# Altium PCB GoldenArduino.PcbDoc
Units mil, origin at the board's own origin, x right, y up, seen from the top; angles counter-clockwise.
Board outline 2625 x 3495 mil, 2 copper layers (Top Layer, Bottom Layer); 52 components, 50 nets, 229 pads, 99 vias.
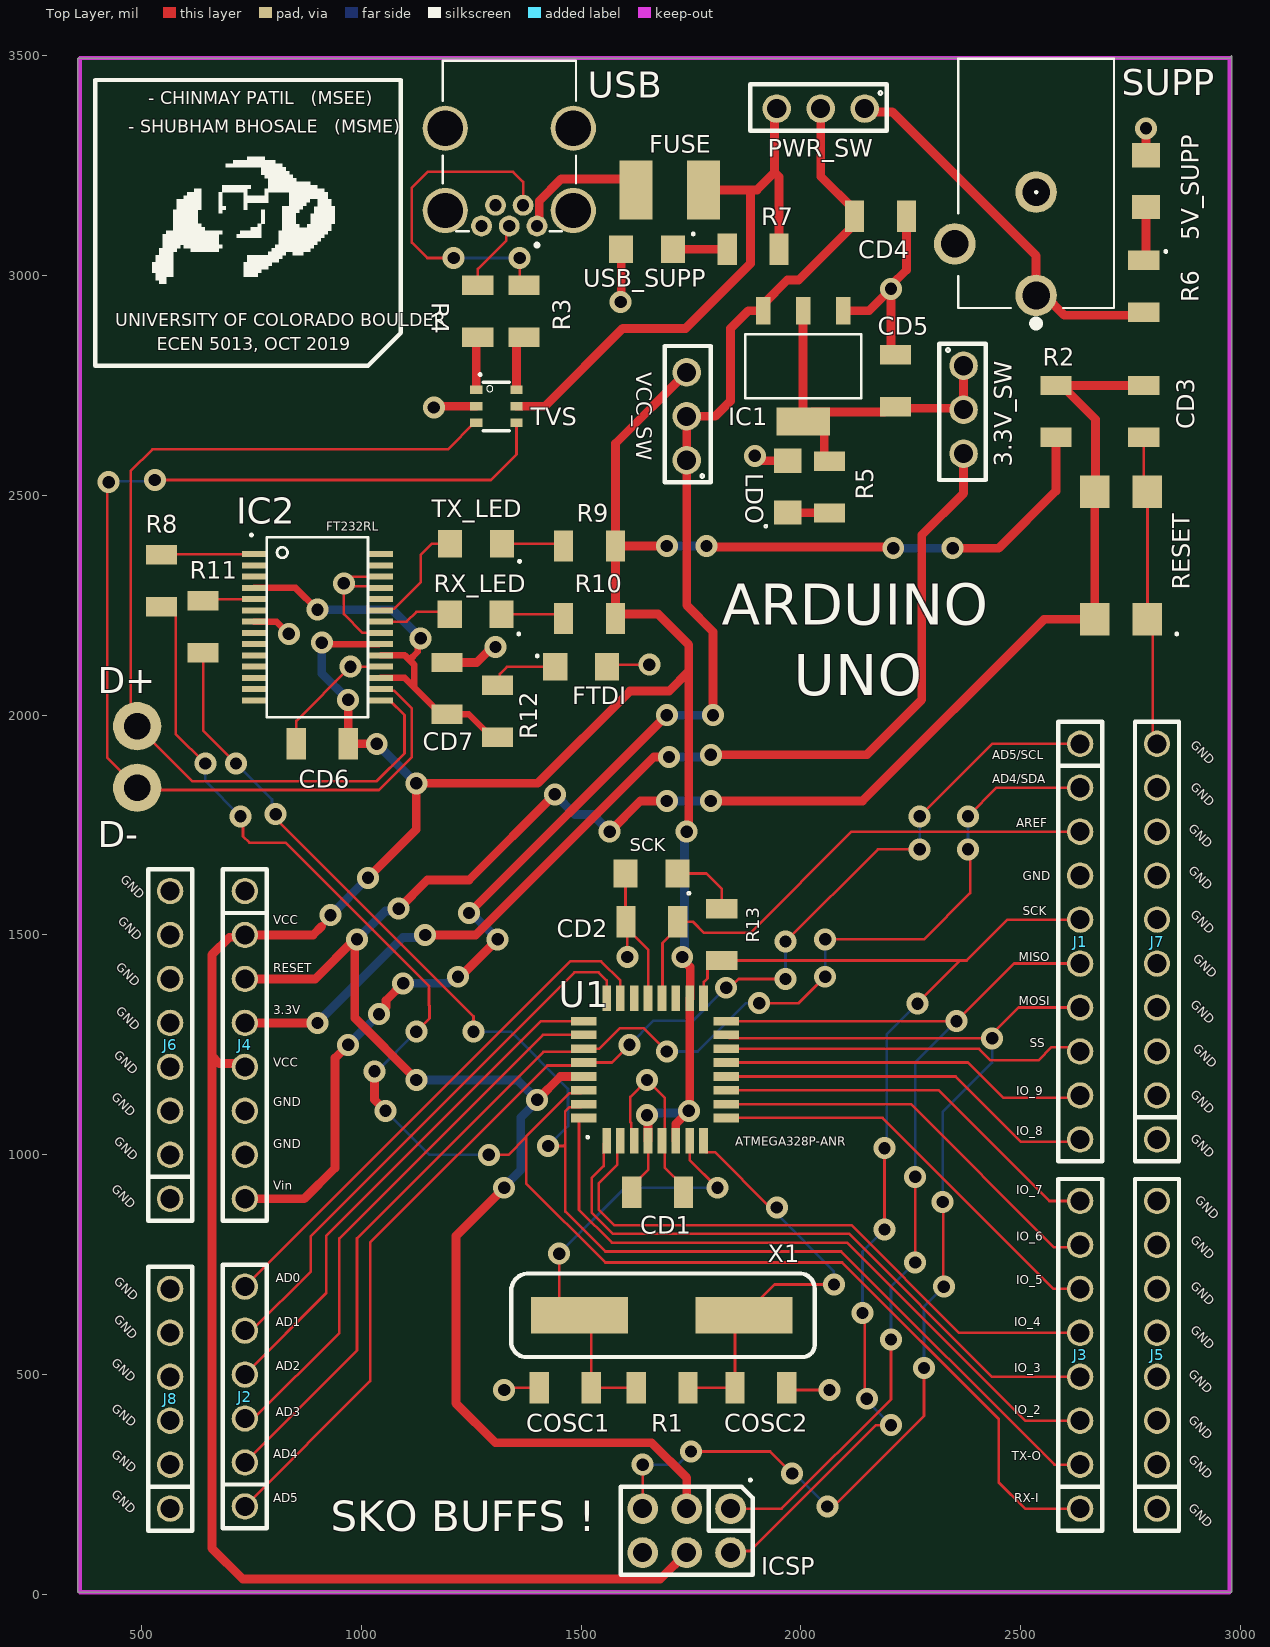
[diagram p0: Top Layer view]
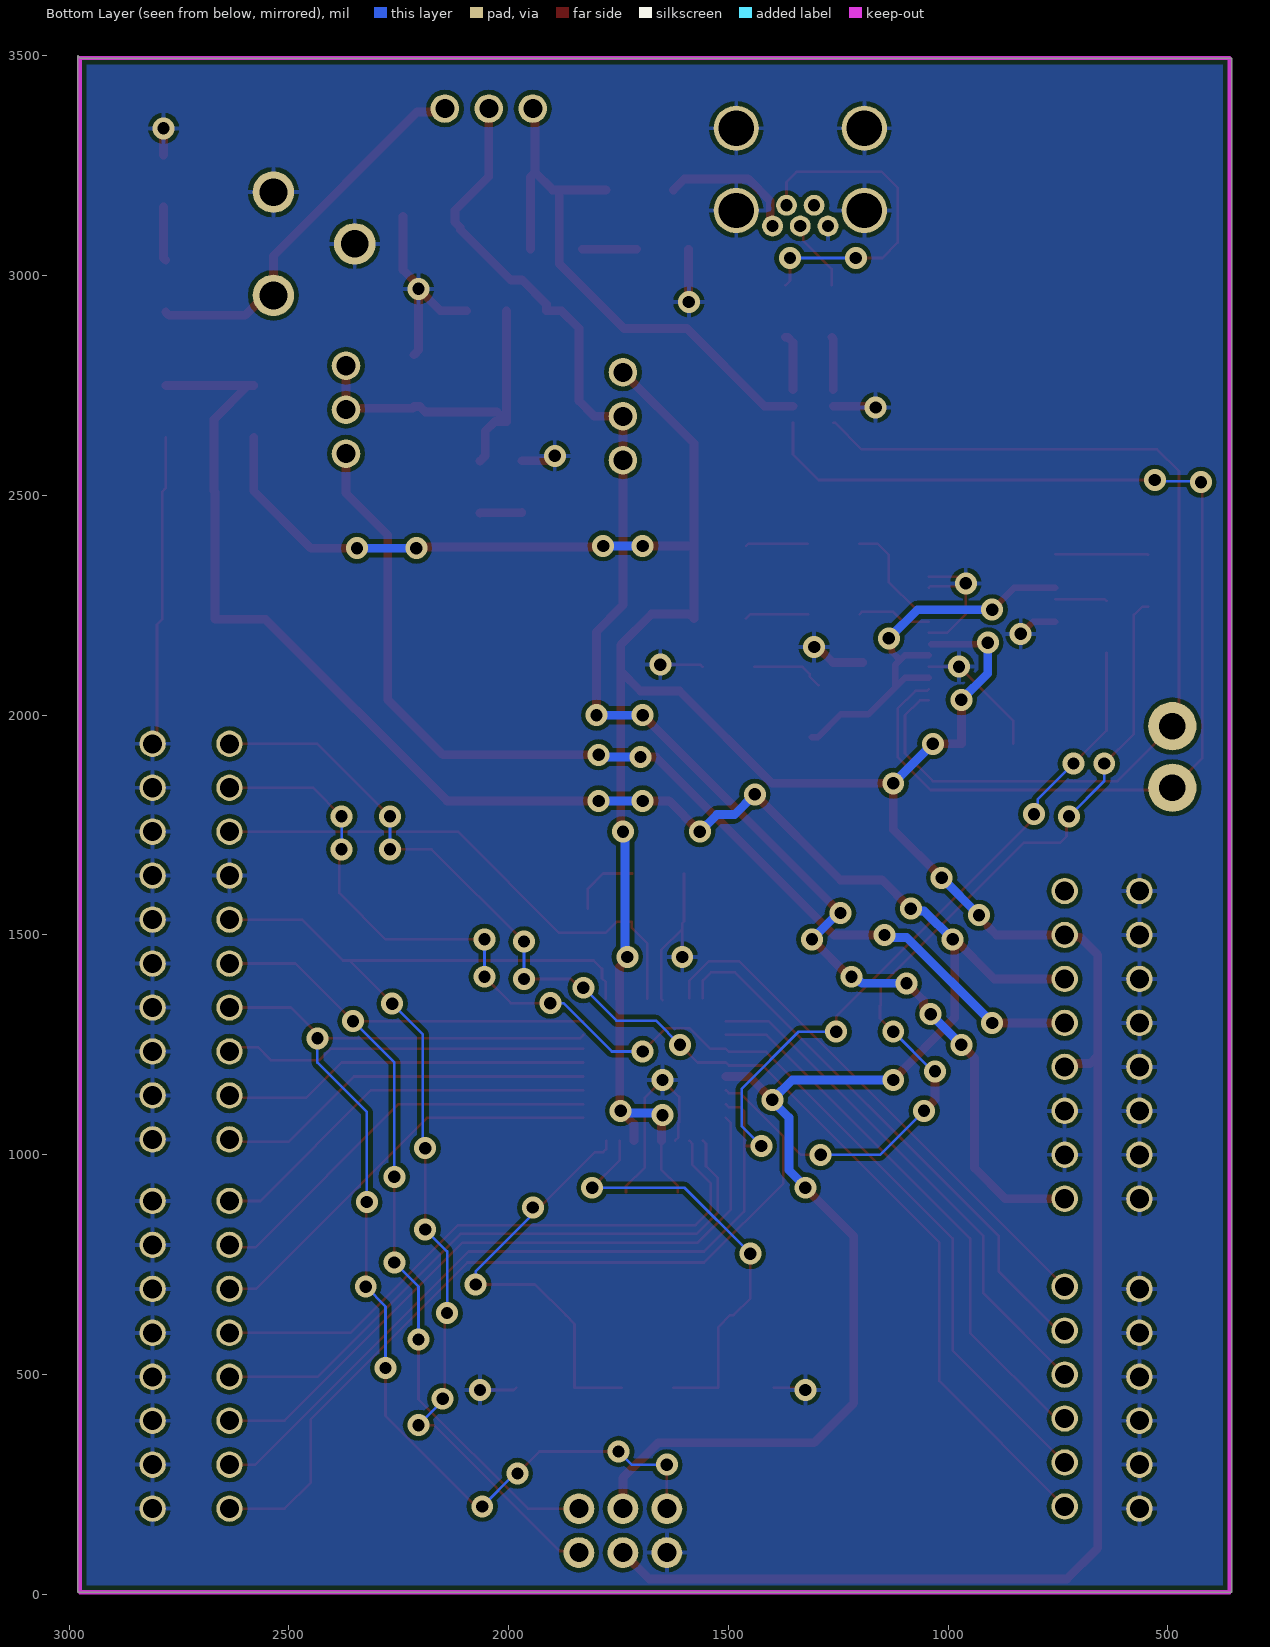
[diagram p1: Bottom Layer view, seen from below]

## Layer stack, top to bottom
Top Solder: solder mask 0.4, Solder Resist, Dk 3.5
Top Layer: signal copper 1.4
Dielectric 1: dielectric 12.6, FR-4, Dk 4.8
Bottom Layer: signal copper 1.4
Bottom Solder: solder mask 0.4, Solder Resist, Dk 3.5

## Board outline
355,3495 355,5 2980,5 2980,3500 2975,3495

## Design rules (kind name [scope] priority, off if disabled: settings)
Clearance [All] p1: gap=10 ignorepadtopadclearanceinfootprint=FALSE except(0: Arc-Hole Track-Hole SMDPad-Hole THPad-Hole Via-Hole Fill-Hole Poly-Hole Region-Hole Text-Hole)
PlaneConnect [All] p1: pad.planeconnectstyle=Relief pad.reliefexpansion=20 pad.reliefentries=4 pad.reliefconductorwidth=10 pad.reliefairgap=10 via.planeconnectstyle=Direct via.reliefexpansion=20 via.reliefentries=4 via.reliefconductorwidth=10 via.reliefairgap=10
PolygonConnect [All] p1: connectstyle=Relief reliefconductorwidth=10 reliefentries=4 polygonreliefangle="90 Angle" airgapwidth=10
RoutingVias [All] p1: holewidth=28 width=50 viastyle="Through Hole" minholewidth=28 minwidth=50 maxholewidth=28 maxwidth=50
SolderMaskExpansion [All] p1: expansion=4
Width [All] p1: maxlimit=20 minlimit=6 preferedwidth=6 minimp=50.000000 maximp=50.000000 favimp=50.000000
29 further rules are at their usual default settings.

## Classes and differential pairs
component class PowerSupply: 3.3V_SW 5V_SUPP 60 CD4 CD5 FUSE IC1 LDO PWR_SW R3 R4 R5 R6 R7 SUPP TVS USB USB_SUPP VCC_SW
component class FTDIChip: CD6 CD7 D+ D- FTDI IC2 R8 R9 R10 R11 R12 RX_LED TX_LED
component class Atmega328: CD1 CD2 CD3 COSC1 COSC2 ICSP J1 J2 J3 J4 J5 J6 J8 R1 R2 R13 RESET SCK U1 X1

## Components (designator, comment, footprint, x,y, rotation, side; value= is the part's Value field where it differs from the comment)
3.3V_SW "PREC003SAAN-RC" 3_PIN 2370.05,2795 r270 top value="CONN HEADER VERT 3POS 2.54MM" (schematic designator H3)
5V_SUPP "LTST-C150CKT" LED 2785,3215 r0 top value="LED RED CLEAR 1206 SMD" (schematic designator D3)
CD1 "22uF" 1206_Passive 1614,915 r0 top value="CAP CER 22UF 16V X5R 1206"
CD2 "22uF" 1206_Passive 1601,1530 r0 top value="CAP CER 22UF 16V X5R 1206"
CD3 "22uF" 1206_Passive 2780,2751 r270 top value="CAP CER 22UF 16V X5R 1206"
CD4 "22uF" 1206_Passive 2121,3135 r0 top value="CAP CER 22UF 16V X5R 1206"
CD5 "22uF" 1206_Passive 2215,2701 r90 top value="CAP CER 22UF 16V X5R 1206"
CD6 "22uF" 1206_Passive 971,1935 r180 top value="CAP CER 22UF 16V X5R 1206"
CD7 "22uF" 1206_Passive 1195,2001 r90 top value="CAP CER 22UF 16V X5R 1206"
COSC1 "22pF" 1206_Passive 1404,470 r0 top value="CAP CER 22PF 16V C0G/NP0 1206"
COSC2 "22pF" 1206_Passive 1969,470 r180 top value="CAP CER 22PF 16V C0G/NP0 1206"
D+ "TESTPOINT" "TEST POINT" 490,1975 r0 top (schematic designator T2)
D- "TESTPOINT" "TEST POINT" 490,1835 r0 top (schematic designator T1)
FTDI "LTST-C150CKT" LED 1500,2110 r270 top value="LED RED CLEAR 1206 SMD" (schematic designator D7)
FUSE "MF-MSMF050-2" FUSE 1776.77,3205 r180 top value="PTC RESET FUSE 15V 500MA 1812" (schematic designator F1)
IC1 "AZ1117CH-3.3TRG1" LDO 2005,2795 r0 top value="IC REG LINEAR 3.3V 800MA SOT223"
IC2 "FT232RL-REEL" FTDI 910,2190 r0 top value="IC USB FS SERIAL UART 28-SSOP"
ICSP "ICSP" ICSP 1840,195 r270 top value=NRPN032PAEN-RC (schematic designator J9)
J1 "PPTC101LFBN-RC" 10_PIN 2635,1032.24 r90 top value="CONN HDR 10POS 0.1 TIN PCB"
J2 "PPTC061LFBN-RC" 6_PIN 735,202.37 r90 top value="CONN HDR 6POS 0.1 TIN PCB"
J3 "PPTC081LFBN-RC" 8_PIN 2635,895 r270 top value="CONN HDR 8POS 0.1 TIN PCB"
J4 "PPTC081LFBN-RC" 8_PIN 735,900 r90 top value="CONN HDR 8POS 0.1 TIN PCB"
J5 "PPTC081LFBN-RC" 8_PIN 2810,895 r270 top value="CONN HDR 8POS 0.1 TIN PCB"
J6 "PPTC081LFBN-RC" 8_PIN 565,1600 r270 top value="CONN HDR 8POS 0.1 TIN PCB"
J7 "PPTC101LFBN-RC" 10_PIN 2810,1937.76 r270 top value="CONN HDR 10POS 0.1 TIN PCB"
J8 "PPTC061LFBN-RC" 6_PIN 565,197.37 r90 top value="CONN HDR 6POS 0.1 TIN PCB"
LDO "LTST-C150CKT" LED 1970,2520 r0 top value="LED RED CLEAR 1206 SMD" (schematic designator D2)
PWR_SW "PREC003SAAN-RC" 3_PIN 2145,3379.95 r180 top value="CONN HEADER VERT 3POS 2.54MM" (schematic designator H1)
R1 "1M" 1206_Passive 1744,470 r180 top value="RES 1M OHM 5% 1/4W 1206"
R2 "RNCP1206FTD1K00" 1206_Passive 2580,2631 r90 top value="RES 1K OHM 1% 1/2W 1206"
R3 "RMCF1206JT300R‎" 1206_Passive 1370,2979 r270 top value=300Ohm
R4 "RMCF1206JT300R‎" 1206_Passive 1265,2859 r90 top value=300Ohm
R5 "RNCP1206FTD1K00" 1206_Passive 2065,2459 r90 top value="RES 1K OHM 1% 1/2W 1206"
R6 "RNCP1206FTD1K00" 1206_Passive 2780,2916 r90 top value="RES 1K OHM 1% 1/2W 1206"
R7 "RNCP1206FTD1K00" 1206_Passive 1951,3060 r180 top value="RES 1K OHM 1% 1/2W 1206"
R8 "RNCP1206FTD1K00" 1206_Passive 545,2366 r270 top value="RES 1K OHM 1% 1/2W 1206"
R9 "RNCP1206FTD1K00" 1206_Passive 1579,2385 r180 top value="RES 1K OHM 1% 1/2W 1206"
R10 "RNCP1206FTD1K00" 1206_Passive 1579,2220 r180 top value="RES 1K OHM 1% 1/2W 1206"
R11 "RNCP1206FTD1K00" 1206_Passive 640,2261 r270 top value="RES 1K OHM 1% 1/2W 1206"
R12 "RNCP1206FTD1K00" 1206_Passive 1310,1949 r90 top value="RES 1K OHM 1% 1/2W 1206"
R13 "RNCP1206FTD1K00" 1206_Passive 1820,1561 r270 top value="RES 1K OHM 1% 1/2W 1206"
RESET "RESET SWITCH" Switch 2730,2365 r0 top value="SWITCH TACTILE SPST-NO 50MA 12V" (schematic designator SW1)
RX_LED "LTST-C150CKT" LED 1260,2230 r90 top value="LED RED CLEAR 1206 SMD" (schematic designator D6)
SCK "LTST-C150CKT" LED 1660,1640 r90 top value="LED RED CLEAR 1206 SMD" (schematic designator D8)
SUPP "Power Jack" Power_Jack 2535,2955 r90 top value="CONN PWR JACK 2X5.5MM SOLDER" (schematic designator J11)
TVS "IP4234CZ6,125" TVS 1305,2700 r90 top value="TVS DIODE 5.5V 6TSOP" (schematic designator D1)
TX_LED "LTST-C150CKT" LED 1261,2390 r90 top value="LED RED CLEAR 1206 SMD" (schematic designator D5)
U1 "ATMEGA328P-ANR" ATMega328P 1668,1195.93 r270 top value="IC MCU 8BIT 32KB FLASH 32TQFP"
USB "XM7D-0512" USB 1482.17,3340.2 r270 top value="CONN RCPT USB2.0 MINI B 5P R/A" (schematic designator J10)
USB_SUPP "LTST-C150CKT" LED 1650,3060 r90 top value="LED RED CLEAR 1206 SMD" (schematic designator D4)
VCC_SW "PREC003SAAN-RC" 3_PIN 1739.95,2580 r90 top value="CONN HEADER VERT 3POS 2.54MM" (schematic designator H2)
X1 "ABLS-16.000MHZ-B4-T" Crystal 1495.98,635 r0 top value="CRYSTAL 16.0000MHZ 18PF SMD"

## Footprints (in the part's own frame and the unit in brackets; to place one, negate y for a bottom-side part, rotate by r counter-clockwise, add the part's x,y. Pads: shape width x height; smd on the part's side, far side on the other; paste and mask are expansions set on the pad)
3_PIN [mm]
  round 1.65 hole 1.1: 1(0,-0.001) 2(2.54,-0.001) 3(5.08,-0.001)
  silkscreen extent -1.27,-1.4 6.6,1.27
6_PIN [mil]
  round 60 hole 43.31: 1(-2.37,0) 2(97.63,0) 3(197.63,0) 4(297.63,0) 5(397.63,0) 6(497.63,0)
  silkscreen extent -52,-50 548,50
8_PIN [mil]
  round 60 hole 43.31: 1(700,0) 2(600,0) 3(500,0) 4(400,0) 5(300,0) 6(200,0) 7(100,0) 8(0,0)
  silkscreen extent -50,-50 750,50
10_PIN [mil]
  round 60 hole 43.31: 1(902.76,0) 2(802.76,0) 3(702.76,0) 4(602.76,0) 5(502.76,0) 6(402.76,0) 7(302.76,0) 8(202.76,0) 9(102.76,0) 10(2.76,0)
  silkscreen extent -47,-50 953,50
1206_Passive [mil]
  rect 44x71 smd: 1(1,0) 2(119,0)
ATMega328P [mil]
  rect 58x20 smd: 1(163.93,-110) 2(163.93,-79) 3(163.93,-47) 4(163.93,-16) 5(163.93,16) 6(163.93,47) 7(163.93,79) 8(163.93,110) 17(-160.07,110) 18(-160.07,79) 19(-160.07,47) 20(-160.07,16) 21(-160.07,-16) 22(-160.07,-47) 23(-160.07,-79) 24(-160.07,-110)
  rect 20x58 smd: 9(111.93,162) 10(80.93,162) 11(48.93,162) 12(17.93,162) 13(-14.07,162) 14(-45.07,162) 15(-77.07,162) 16(-108.07,162) 25(-108.07,-162) 26(-77.07,-162) 27(-45.07,-162) 28(-14.07,-162) 29(17.93,-162) 30(48.93,-162) 31(80.93,-162) 32(111.93,-162)
Crystal [mm]
  rect 5.6x2.1 smd: 1(0,0) 2(9.5,0)
  silkscreen extent -3.95,-2.41 13.6,2.41
FTDI [mil]
  rect 55x13.7 smd: 1(-153.94,176.34) 2(-153.94,150.75) 3(-153.94,125.16) 4(-153.94,99.57) 5(-153.94,73.98) 6(-153.94,48.39) 7(-153.94,22.8) 8(-153.94,-2.8) 9(-153.94,-28.39) 10(-153.94,-53.98) 11(-153.94,-79.57) 12(-153.94,-105.16) 13(-153.94,-130.75) 14(-153.94,-156.34) 15(133.94,-156.34) 16(133.94,-130.75) 17(133.94,-105.16) 18(133.94,-79.57) 19(133.94,-53.98) 20(133.94,-28.39) 21(133.94,-2.8) 22(133.94,22.8) 23(133.94,48.39) 24(133.94,73.98) 25(133.94,99.57) 26(133.94,125.16) 27(133.94,150.75) 28(133.94,176.34)
  silkscreen extent -125,-195 105,215
FUSE [mm]
  rect 1.9x3.4 smd: 1(3.855,0.254) 2(-0.045,0.254)
ICSP [mil]
  round 70 hole 43.31: 1(0,0) 2(100,0) 3(0,-100) 4(100,-100) 5(0,-200) 6(100,-200)
  silkscreen extent -50,-250 150,50
LDO [mil]
  rect 33x63 smd: 1(91,124.94) 2(0,124.94) 3(-91,124.94)
  rect 122x63 smd: 4(0,-127.06)
  silkscreen extent -132,-74 132,72
LED [mil]
  rect 63x55 smd: 1(0,59) 2(0,-59)
Power_Jack [mm]
  round 2.4 hole 1.6: 1(0,0) 2(5.969,0) 3(2.977,4.7)
  silkscreen extent -1.82,-4.5 13.68,4.5
Switch [mm]
  rect 1.7x1.9 smd: 1(1.479,-3.727) 2(1.479,3.639) 3(-1.569,-3.727) 4(-1.569,3.639)
"TEST POINT" [mil]
  round 110 hole 60: 1(0,0)
TVS [mm]
  rect 0.508x0.7 smd: 1(1.02,1.106) 2(0.07,1.106) 3(-0.88,1.106) 4(-0.88,-1.22) 5(0.07,-1.22) 6(1.02,-1.22)
  silkscreen extent -1.33,-0.81 1.47,0.69
USB [mm]
  round 1.208 hole 0.7: 1(5.777,-2.1) 2(4.577,-2.9) 3(5.777,-3.7) 4(4.577,-4.5) 5(5.777,-5.3)
  round 2.616 hole 2.032: SH1(0.127,-7.4) SH2(4.877,-7.4) SH3(4.877,0) SH4(0.127,0)
  silkscreen extent -3.77,-7.55 6.98,0.15

## Part data
3.3V_SW PWR_SW VCC_SW: library part 3_PIN, "Connector Header Through Hole 3 position 0.100\" (2.54mm)", Digikey Link=https://www.digikey.com/product-detail/en/PREC003SAAN-RC/S1012EC-03-ND/2774851/?itemSeq=304982371, Digikey Part=S1012EC-03-ND
5V_SUPP FTDI LDO RX_LED SCK TX_LED USB_SUPP: library part 1206_RED_LED, "Red 638nm LED Indication - Discrete 1.8V 1206 (3216 Metric)", Digikey Link=https://www.digikey.com/product-detail/en/LTST-C150CKT/160-1167-1-ND/269239/?itemSeq=304982368, Digikey Part=160-1167-1-ND
CD1 CD2 CD3 CD4 CD5 CD6 CD7: library part 1206_22uF, "22µF ±20% 16V Ceramic Capacitor X5R 1206 (3216 Metric)", Digikey Link=https://www.digikey.com/product-detail/en/CL31A226MOCLNNC/1276-2728-1-ND/3890814/?itemSeq=304982363, Digikey Part=1276-2728-1-ND
COSC1 COSC2: library part 1206_22pF, "22pF ±5% 16V Ceramic Capacitor C0G, NP0 1206 (3216 Metric)", Digikey Link=https://www.digikey.com/product-detail/en/885012008011/732-7867-1-ND/5454494/?itemSeq=304982362, Digikey Part=732-7867-1-ND
D+ D-: library part "TEST POINT"
FUSE: library part Fuse, "Polymeric PTC Resettable Fuse 15V 500mA Ih Surface Mount 1812 (4532 Metric), Concave", Digikey Link=https://www.digikey.com/product-detail/en/MF-MSMF050-2/MF-MSMF050-2CT-ND/662842/?itemSeq=304982360, Digikey Part=MF-MSMF050-2CT-ND
IC1: library part 3.3V_LDO, "Linear Voltage Regulator IC Positive Fixed 1 Output 1A SOT-223", Digikey Link=https://www.digikey.com/product-detail/en/AZ1117CH-3.3TRG1/AZ1117CH-3.3TRG1DICT-ND/4505206/?itemSeq=304982370, Digikey Part=AZ1117CH-3.3TRG1DICT-ND
IC2: library part FTDI, "USB Bridge, USB to UART USB 2.0 UART Interface 28-SSOP", Digikey Link=https://www.digikey.com/product-detail/en/FT232RL-REEL/768-1007-1-ND/1836402/?itemSeq=304982359, Digikey Part=768-1007-1-ND
ICSP: "Connector Header Through Hole 6 position 0.079\" (2.00mm)", Digikey Link=https://www.digikey.com/product-detail/en/NRPN032PAEN-RC/S5801-03-ND/804955/?itemSeq=304982355, Digikey Part=S5801-03-ND
J1 J7: library part 10_PIN_FEMALE, "10 Position Header Connector 0.100\" (2.54mm) Through Hole Tin", Digikey Link=https://www.digikey.com/product-detail/en/PPTC101LFBN-RC/S7008-ND/810149/?itemSeq=304982352, Digikey Part=S7008-ND
J2 J8: library part 6_PIN_FEMALE, "6 Position Header Connector 0.100\" (2.54mm) Through Hole Tin", Digikey Link=https://www.digikey.com/product-detail/en/PPTC061LFBN-RC/S7004-ND/810145/?itemSeq=304982353, Digikey Part=S7004-ND
J3 J4 J5 J6: library part 8_PIN_FEMALE, "8 Position Header Connector 0.100\" (2.54mm) Through Hole Tin", Digikey Link=https://www.digikey.com/product-detail/en/PPTC081LFBN-RC/S7006-ND/810147/?itemSeq=304982354, Digikey Part=S7006-ND
R1: library part 1206_1M, "1 MOhms ±5% 0.25W, 1/4W Chip Resistor 1206 (3216 Metric) Automotive AEC-Q200 Thick Film", Digikey Link=https://www.digikey.com/product-detail/en/RMCF1206JT1M00/RMCF1206JT1M00CT-ND/1942830/?itemSeq=304982358, Digikey Part="Number RMCF1206JT1M00CT-ND"
R2 R5 R6 R7 R8 R9 R10 R11 R12 R13: library part 1206_1K, "1 kOhms ±1% 0.5W, 1/2W Chip Resistor 1206 (3216 Metric) Anti-Sulfur, Moisture Resistant Thin Film", Digikey Link=https://www.digikey.com/product-detail/en/RNCP1206FTD1K00/RNCP1206FTD1K00CT-ND/2240675/?itemSeq=304982373, Digikey Part=RNCP1206FTD1K00CT-ND
R3 R4: library part 1206_300Ohm, "300 Ohms ±5% 0.25W, 1/4W Chip Resistor 1206 (3216 Metric) Automotive AEC-Q200 Thick Film", Digikey Link=https://www.digikey.com/product-detail/en/RMCF1206JT300R/RMCF1206JT300RCT-ND/1942776/?itemSeq=304982374, Digikey Part=RMCF1206JT300RCT-ND
RESET: library part Push_Button, "Tactile Switch SPST-NO Top Actuated Surface Mount", Digikey Link=https://www.digikey.com/product-detail/en/TL3305AF160QG/EG5350CT-ND/5816195/?itemSeq=304982361, Digikey Part=EG5350CT-ND
SUPP: "Power Barrel Connector Jack 2.10mm ID (0.083\"), 5.50mm OD (0.217\") Through Hole, Right Angle", Digikey Link=https://www.digikey.com/product-detail/en/PJ-102A/CP-102A-ND/275425/?itemSeq=304982367, Digikey Part=CP-102A-ND
TVS: library part TVS_Diode, "Clamp Ipp Tvs Diode Surface Mount 6-TSOP", Digikey Link=https://www.digikey.com/product-detail/en/IP4234CZ6%2c125/1727-4717-1-ND/2531156/?itemSeq=304982369, Digikey Part=1727-4717-1-ND
U1: library part ATMega328P, "AVR AVR® ATmega Microcontroller IC 8-Bit 20MHz 32KB (16K x 16) FLASH 32-TQFP (7x7)", Digikey Link=https://www.digikey.com/product-detail/en/ATMEGA328P-ANR/ATMEGA328P-ANRCT-ND/2774230/?itemSeq=304982365, Digikey Part=ATMEGA328P-ANRCT-ND
USB: library part USB, "USB - mini B USB 2.0 Receptacle Connector 5 Position Through Hole, Right Angle", Digikey Link=https://www.digikey.com/product-detail/en/XM7D-0512/OR1205-ND/4695531/?itemSeq=304982356, Digikey Part=OR1205-ND
X1: library part 16MHz_Crystal, "16MHz ±30ppm Crystal 18pF 40 Ohms HC-49/US", Digikey Link=https://www.digikey.com/product-detail/en/ABLS-16.000MHZ-B4-T/535-10226-1-ND/2184261/?itemSeq=304982364, Digikey Part=535-10226-1-ND

## Via types
v1: diameter 50, hole 28, Top Layer to Bottom Layer, 99 vias

## Nets (pads, with @x,y where several pads share a name; then routed paths per layer and width w, separated by ;. In a path a pad name is that pad's centre, name@x,y a point inside that pad or via, vN(x,y) a via of type N, cw(c..) or ccw(c..) an arc to the next point about the centre after c; other vN are vias at no path point)
3.3V: 3.3V_SW.1 3.3V_SW.2 CD5.1 IC1.2 IC1.4 R5.2 | length 864.3
  Top Layer w20: IC1.2 IC1.4 ; R5.2 2053,2590 2053,2646.44 2031.5,2667.94 IC1.4 ; 3.3V_SW.1 3.3V_SW.2 2366.5,2698.5 2218.5,2698.5 CD5.1 2201.5,2702 2188.94,2689.44 2026.5,2689.44 IC1.4
3.3V_VCC: 3.3V_SW.3 J4.4 | length 2443.8
  Top Layer w20: J4.4 v1(900,1300) ; v1(1145,1500) 1260,1500 1665,1905 v1(1700,1905) ; v1(1795,1910) 2150,1910 2275,2035 2275,2410 2370,2505 3.3V_SW.3
  Bottom Layer w20: v1(900,1300) 1094.26,1494.26 1139.26,1494.26 v1(1145,1500) ; v1(1700,1905) 1790,1905 v1(1795,1910)
3V3OUT: CD7.1 IC2.4 IC2.17 IC2.19 R12.1 | length 944.6
  Top Layer w15: IC2.4 850.43,2289.57 v1(900,2240) ; IC2.17 1098.66,2084.84 1120,2063.5 ; IC2.19 1098.98,2136.02 1109.49,2125.51 ; v1(1135,2175) 1128.3,2168.3 1128.3,2144.33 1109.49,2125.51 ; R12.1 1296.5,1950 1244.5,2002 CD7.1 1181.5,2002 1120,2063.5 ; 1109.49,2125.51 1120,2115 1120,2063.5
  Bottom Layer w20: v1(900,2240) 1070,2240 v1(1135,2175)
AD0: J2.6 U1.23 | length 1218.7
  Top Layer w6: J2.6 1475,1440 1545,1440 1589,1396 U1.23
AD1: J2.5 U1.24 | length 1255.9
  Top Layer w6: J2.5 750,600 885,735 885,815 1485,1415 1540,1415 1558,1397 U1.24
AD2: J2.4 U1.25 | length 1180.2
  Top Layer w6: J2.4 920,685 920,815 1409,1304 U1.25
AD3: J2.3 U1.26 | length 1258.6
  Top Layer w6: J2.3 755,400 950,595 950,810 1413,1273 U1.26
AD4/SDA: J1.2 J2.2 U1.27 | length 2888.5
  Top Layer w6: J2.2 990,555 990,810 1414,1234 1499,1234 U1.27 1541,1241 1588,1288 1642,1288 v1(1695,1235) ; v1(1905,1345) 1995,1345 v1(2055,1405) ; v1(2055,1490) 2280,1490 2385,1595 2385,1690 v1(2380,1695) ; v1(2380,1770) 2445,1835 J1.2
  Bottom Layer w6: v1(1695,1235) 1765,1235 1875,1345 v1(1905,1345) ; v1(2055,1405) v1(2055,1490) ; v1(2380,1695) v1(2380,1770)
AD5/SCL: J1.1 J2.1 U1.28 | length 2915.9
  Top Layer w6: J2.1 1020,485 1020,800 1423,1203 1499,1203 U1.28 1570,1210 v1(1610,1250) ; v1(1830,1380) 1838.08,1380 1858.08,1400 v1(1965,1400) ; v1(1965,1485) 2175,1695 v1(2270,1695) ; v1@2270,1751 v1(2270,1770) 2435,1935 J1.1
  Bottom Layer w6: v1(1610,1250) 1665,1305 1755,1305 v1(1830,1380) ; v1(1965,1400) v1(1965,1485) ; v1(2270,1695) v1(2270,1770)
AREF: CD2.2 J1.3 U1.20 | length 1210.1
  Top Layer w6: U1.20@1685,1355 1685,1481.5 1720,1516.5 CD2.2 1755,1530 1780,1505 1885,1505 2115,1735 J1.3
D+: D+.1 IC2.15 TVS.3 | length 2259.6
  Top Layer w6: IC2.15 1064.59,2033.66 1098.25,2000 1098.25,1913.25 1035,1850 615,1850 D+.1 475,1990 475,2555 525,2605 1197.34,2605 1257.7,2665.35 TVS.3
D-: D-.1 IC2.16 TVS.4 | length 2608.6
  Top Layer w6: v1(425,2530) 422,2527 422,1903 D-.1 495,1830 1040,1830 1115,1905 1115,2015.33 1074.93,2055.4 1047.79,2055.4 IC2.16 ; v1(530,2535) 1295,2535 1353.01,2593.01 TVS.4
  Bottom Layer w6: v1(425,2530) 427.5,2532.5 527.5,2532.5 v1(530,2535)
Dminus: R3.1 USB.2 | length 781.1
  Top Layer w6: v1(1210,3040) 1150,3040 1115,3075 1115,3200 1150.98,3235.98 1345,3235.98 1367.99,3212.99 USB.2 ; v1(1360,3040) 1360,2988 R3.1
  Bottom Layer w6: v1(1210,3040) v1(1360,3040)
Dplus: R4.2 USB.3 | length 164.4
  Top Layer w6: R4.2 1265,3015 1329.98,3079.98 1329.98,3106.24 USB.3
GND: 5V_SUPP.1 CD1.2 CD2.1 CD3.2 CD4.2 CD5.2 CD6.2 CD7.2 COSC1.1 COSC2.1 FTDI.1 IC1.1 IC2.7 IC2.18 IC2.21 IC2.25 IC2.26 ICSP.6 J1.4 J4.6 J4.7 J5.1 J5.2 J5.3 J5.4 J5.5 J5.6 J5.7 J5.8 J6.1 J6.2 J6.3 J6.4 J6.5 J6.6 J6.7 J6.8 J7.1 J7.2 J7.3 J7.4 J7.5 J7.6 J7.7 J7.8 J7.9 J7.10 J8.1 J8.2 J8.3 J8.4 J8.5 J8.6 LDO.1 RESET.1 RESET.2 SCK.1 SUPP.2 SUPP.3 TVS.2 U1.3 U1.5 U1.21 USB.5 USB.SH1 USB.SH2 USB.SH3 USB.SH4 USB_SUPP.1 | length 3468.9
  Top Layer w6: CD6.2 852,1987 v1(975.43,2110.43) IC2.18 ; IC2.21 1002.8,2187.2 960,2230 v1(960,2300) ; IC2.25 1040.09,2293.42 966.58,2293.42 v1(960,2300) ; IC2.26 975.16,2315.16 v1(960,2300) ; v1(1325,465) 1330,470 COSC1.1@1397,470 ; FTDI.1 1564,2115 v1(1655,2115) ; SCK.1 1601,1531 CD2.1 1605,1527 CD2.1@1605,1513.5 ; v1(1605,1450) CD2.1@1605,1513.5 ; U1.3 1614,1039 1614,1072.26 1612,1074.26 1612,1132 v1(1650,1170) 1690,1130 1690,971.5 1733,928.5 CD1.2 ; U1.21@1650,1352 1653,1355 1653,1465.5 CD2.1@1605,1513.5 ; COSC2.1@1983,470 1988,465 v1(2065,465) ; CD3.2 2780,2516.49 RESET.2 RESET.1 2800,2206.49 2800,1945 J7.10
  Top Layer w15: IC2.7 807.2,2212.8 v1(835,2185)
  Top Layer w20: v1(1165,2700) 1167.76,2702.76 TVS.2 ; CD7.2 1262.22,2120 1297.22,2155 v1(1305,2155) ; v1(1590,2940) 1591,2941 USB_SUPP.1 ; v1(1895,2590) 1906,2579 LDO.1 ; IC1.1 2154.94,2919.94 v1(2205,2970) ; CD5.2 2205,2830 v1(2205,2970) ; CD4.2 2240,3012.78 2205,2977.78 v1(2205,2970) ; 5V_SUPP.1 v1(2785,3335)
IO_2: J3.3 U1.32 | length 1552.5
  Top Layer w6: U1.32 1495,1073 1495,874.75 1569.75,800 2105,800 2510,395 J3.3
IO_3: J3.4 U1.1 | length 1443.4
  Top Layer w6: U1.1 1551,1025 1551,974 1524,947 1524,868.37 1572.37,820 2110,820 2435,495 J3.4
IO_4: J3.5 U1.2 | length 1388.3
  Top Layer w6: U1.2 1582,1025 1582,977 1540,935 1540,875 1575,840 2115,840 2360,595 J3.5
IO_5: J3.6 U1.9 | length 966.1
  Top Layer w6: U1.9 2186,1084 2575,695 J3.6
IO_6: J3.7 U1.10 | length 941.7
  Top Layer w6: U1.10 2250,1115 2575,790 2630,790 J3.7
IO_7: J3.8 U1.11 | length 909.4
  Top Layer w6: U1.11 2313,1147 2565,895 J3.8
IO_8: J1.10 U1.12 | length 868.4
  Top Layer w6: U1.12 2352,1178 2500,1030 2630,1030 J1.10
IO_9: J1.9 U1.13 | length 840.2
  Top Layer w6: U1.13 2380,1210 2460,1130 2630,1130 J1.9
MISO: ICSP.1 J1.6 U1.16 | length 2249.3
  Top Layer w6: U1.16 v1(2354,1304) 2485,1435 J1.6 ; ICSP.1 1956.26,195 2205,443.74 v1(2205,580) ; v1(2260,755) v1(2260,950)
  Bottom Layer w6: v1(2205,580) 2205,700 v1(2260,755) ; v1(2260,950) 2260,1210 v1(2354,1304)
MOSI: ICSP.5 J1.7 U1.15 | length 2667.8
  Top Layer w6: ICSP.5 v1(1640,295) ; v1(1750,325) 1930,325 v1(1980,275) ; U1.15 1838,1265 v1(2435,1265) 2435,1275 2495,1335 J1.7 ; v1(2060,200) 2073.74,200 2280,406.26 v1(2280,515) v1@2270,515 ; v1(2322.5,892.5) 2323.75,891.25 2323.75,701.25 v1(2325,700)
  Bottom Layer w6: v1(1640,295) 1720,295 v1(1750,325) ; v1(1980,275) 1985,275 v1(2060,200) ; v1(2280,515) 2280,655 v1(2325,700) ; v1(2322.5,892.5) 2322.5,1097.5 2435,1210 v1(2435,1265)
Net3.3V_LDO_2: LDO.2 R5.1 | length 95.4
  Top Layer w20: LDO.2 1970.5,2460.5 2064.5,2460.5 R5.1
Net5V_SUPP_2: 5V_SUPP.2 R6.2 | length 123.1
  Top Layer w20: R6.2 2785,3040 5V_SUPP.2
NetCOSC1_2: COSC1.2 R1.2 U1.7 X1.1 | length 996.9
  Top Layer w6: v1(1450,775) 1450,673.34 1488.34,635 X1.1 1523,607.98 COSC1.2 R1.2 ; U1.7 1747,988 v1(1810,925)
  Bottom Layer w6: v1(1450,775) 1600,925 v1(1810,925)
NetCOSC2_2: COSC2.2 R1.1 U1.8 X1.2 | length 984.2
  Top Layer w6: R1.1 COSC2.2 1850,615 X1.2 1940,705 v1(2075,705) ; U1.8 1778,1013 1785,1006 1804,1006 1930,880 v1(1945,880)
  Bottom Layer w6: v1(1945,880) 1945,865 2075,735 v1(2075,705)
NetD8_2: R13.1 SCK.2 | length 160.5
  Top Layer w6: SCK.2 1785,1640 1820,1605 R13.1
NetFTDI_2: FTDI.2 R12.2 | length 166.9
  Top Layer w6: R12.2@1295,2068 1315,2088 1315,2094 1331,2110 FTDI.2
NetR3_2: R3.2 TVS.6 | length 129.8
  Top Layer w20: TVS.6 1353.01,2848 1365.01,2860 R3.2
NetR4_1: R4.1 TVS.1 | length 121.3
  Top Layer w20: TVS.1 1261.48,2856.48 R4.1
NetR7_2: R7.2 USB_SUPP.2 | length 123
  Top Layer w20: USB_SUPP.2 R7.2
NetR9_2: R9.2 TX_LED.2 | length 142.1
  Top Layer w6: TX_LED.2 1455,2390 R9.2
NetR10_2: R10.2 RX_LED.2 | length 145.1
  Top Layer w6: RX_LED.2 1450,2230 R10.2
RESET: CD3.1 ICSP.3 J4.3 R2.2 RESET.3 RESET.4 U1.29 | length 5333.4
  Top Layer w20: J4.3 895,1400 985,1490 985,1311.36 1125,1171.36 v1(1125,1170) ; v1(1085,1560) 1150,1625 1245,1625 v1(1440,1820) ; v1(1325,925) 1215,815 1215,435 1305,345 1660,345 1740,265 ICSP.3 ; v1(1400,1125) 1453,1178 U1.29 ; v1(1565,1735) 1635,1805 v1(1695,1805) ; v1(1795,1805) 2140,1805 2553.26,2218.26 RESET.3 RESET.4 2670,2510.03 2670,2673.5 R2.2@2593.5,2750 ; R2.2 R2.2@2593.5,2750 ; CD3.1 R2.2@2593.5,2750
  Bottom Layer w20: v1(990,1490) 1054.26,1554.26 1079.26,1554.26 v1(1085,1560) ; v1(1125,1170) 1355,1170 v1(1400,1125) 1400,1122.22 1362.5,1084.72 1362.5,965.28 1325,927.78 v1(1325,925) ; v1(1440,1820) 1486.11,1773.89 1526.11,1773.89 v1(1565,1735) ; v1(1695,1805) v1(1795,1805)
RX-I: J3.1 R8.2 U1.30 | length 3830.8
  Top Layer w6: R8.2 558.5,2247 577.5,2228 577.5,1957.5 v1(645,1890) ; v1(725,1770) 730.74,1764.26 730.74,1724.26 745,1710 827.47,1710 1153.74,1383.74 1153.74,1340 1155,1338.74 1155,1310 v1(1125,1280) ; v1(1290,1000) 1335,1000 1375,1040 ; U1.30 1499,1140 1473.62,1140 1375,1041.38 1375,1040 ; J3.1 2510,195 2450,255 2450,398.74 2093.74,755 1555,755 1375,935 1375,1040
  Top Layer w20: v1(1030,1190) 1030,1125 v1(1055,1100)
  Bottom Layer w6: v1(645,1890) 645,1850 v1(725,1770) ; v1(1030,1190) 1035,1190 v1(1125,1280) ; v1(1055,1100) 1155,1000 v1(1290,1000)
RXD: IC2.5 R11.1 | length 117.7
  Top Layer w6: R11.1 643.98,2263.98 IC2.5
RXLED: IC2.22 RX_LED.1 | length 168.3
  Top Layer w6: IC2.22 1102.8,2212.8 1125,2235 1196,2235 RX_LED.1
SCK: ICSP.2 J1.5 R13.2 U1.17 | length 2626.4
  Top Layer w6: U1.17@1779,1355 1779,1393 1787.5,1401.5 1787.5,1423 1806.5,1442 R13.2 2362,1442 ; ICSP.2 1843.79,98.79 1884,98.79 2170.21,385 v1(2205,385) ; v1(2140,640) 2145,635 2145,450 v1(2150,445) ; v1(2190,830) v1(2190,1015) ; v1(2265,1343.75) 2265,1345 2362,1442 ; J1.5 2470,1535 2377,1442 2362,1442
  Bottom Layer w6: v1(2140,640) 2140,780 v1(2190,830) ; v1(2150,445) 2150,440 v1(2205,385) ; v1(2190,1015) 2195,1020 2195,1273.75 v1(2265,1343.75)
SS: J1.8 U1.14 | length 832.3
  Top Layer w6: U1.14 2405.26,1241 2431.26,1215 2540,1215 2570,1245 2625,1245 J1.8
SUPP: PWR_SW.1 R6.1 SUPP.1 | length 885.3
  Top Layer w20: PWR_SW.1 2152.48,3372.52 2207.48,3372.52 2535,3045 SUPP.1 2554.24,2955 2599.24,2910 2773,2910 R6.1
TX-O: J3.2 R11.2 U1.31 | length 3261.7
  Top Layer w6: R11.2 640,1965 v1(715,1890) ; v1(805,1775) 805,1765 1255,1315 v1(1255,1280) ; v1(1425,1020) 1459,1020 1464,1025 ; U1.31 1499,1108 1472.62,1108 1464,1099.38 1464,1025 ; J3.2 2576.37,295 2091.37,780 1555,780 1464,871 1464,1025
  Bottom Layer w6: v1(715,1890) 796.58,1808.42 796.58,1783.42 v1(805,1775) ; v1(1255,1280) 1340,1280 1470,1150 1470,1065 v1(1425,1020)
TXD: IC2.1 R8.1 | length 211.6
  Top Layer w6: R8.1 546.34,2366.34 IC2.1
TXLED: IC2.23 TX_LED.1 | length 257.6
  Top Layer w6: IC2.23 1047.79,2242.24 1074.93,2242.24 1135,2302.3 1135,2365 1160,2390 TX_LED.1
USB_SUPP: FUSE.2 PWR_SW.3 R7.1 TVS.5 | length 1338.4
  Top Layer w20: TVS.5 1417.76,2702.76 1595,2880 1737.78,2880 1885,3027.22 1885,3195 ; FUSE.2 1885,3195 ; PWR_SW.3 1940,3375 1940,3235 ; R7.1 1950,3225 1940,3235 ; 1885,3195 1900,3195 1940,3235
USB_VCC: FUSE.1 USB.1 | length 310.6
  Top Layer w20: USB.1 1404.77,3118.04 1404.77,3169.77 1455,3220 1600,3220 FUSE.1
VCC: CD1.1 CD6.1 IC2.20 ICSP.4 J4.2 J4.5 R2.1 R9.1 R10.1 U1.4 U1.6 U1.18 VCC_SW.3 | length 7983.8
  Top Layer w6: v1(910,2165) v1@911.69,2163.31 ; CD1.1 1615,928.5 1653,966.5 U1.4@1653,1031
  Top Layer w15: v1@910,2161.61 IC2.20@1038.94,2161.61
  Top Layer w20: J4.5 727.35,1207.65 677.35,1207.65 660,1225 ; 910,1520 890,1500 J4.2 730,1495 700,1495 660,1455 660,1225 ; v1(970,2035) CD6.1 v1(1035,1935) ; v1(1015,1630) 1125,1740 v1(1125,1845) 1401.36,1845 1611.36,2055 1700,2055 1745,2100 ; v1(1650,1090) 1652,1088 U1.4 ; v1(1695,2385) R9.1 ; U1.6 1715,1070 v1(1745,1100) 1747,1102 U1.18 ; v1(1730,1450) 1730,1445 1748,1427 U1.18@1748,1355 ; ICSP.4 1680,35 730,35 660,105 660,1225 ; v1(1740,1735) 1745,1740 1745,2100 ; VCC_SW.3 1578,2618 R9.1 ; v1(1785,2385) 1787.5,2382.5 2207.5,2382.5 v1(2210,2380) ; v1(2345,2380) 2450,2380 2580,2510 R2.1 ; R9.1 R10.1 1588,2230 1675,2230 1745,2160 1745,2100
  Bottom Layer w20: v1(910,2165) 910,2095 v1(970,2035) ; v1(930,1545) v1(1015,1630) ; v1(1035,1935) v1(1125,1845) ; v1(1650,1090) 1655,1095 1740,1095 v1(1745,1100) ; v1(1695,2385) v1(1785,2385) ; v1(1730,1450) 1735,1455 1735,1730 v1(1740,1735) ; v1(2210,2380) v1(2345,2380)
VIN: CD4.1 IC1.3 J4.8 PWR_SW.2 VCC_SW.1 VCC_SW.2 | length 3474.1
  Top Layer w20: J4.8 870,900 940,970 940,1220 v1(970,1250) ; v1(1040,1320) 1056.11,1336.11 1056.11,1351.11 v1(1095,1390) ; v1(1220,1405) 1225,1405 v1(1310,1490) ; v1(1245,1550) v1(1695,2000) ; v1(1800,2000) 1800,2190 1740,2250 VCC_SW.1 VCC_SW.2 1805,2680 1840,2715 1840,2880 1880,2920 1913.94,2920 IC1.3 1914,2934.94 1969.06,2990 1995,2990 2110,3105 2110,3109.5 2122,3121.5 CD4.1 2122,3148.5 2045,3225.5 PWR_SW.2
  Bottom Layer w20: v1(970,1250) v1(1040,1320) ; v1(1095,1390) 1196.88,1390 1211.88,1405 v1(1220,1405) ; v1(1245,1550) 1250,1550 v1(1310,1490) ; v1(1695,2000) v1(1800,2000)
pads on no net: IC2.2 IC2.3 IC2.6 IC2.8 IC2.9 IC2.10 IC2.11 IC2.12 IC2.13 IC2.14 IC2.24 IC2.27 IC2.28 J4.1 U1.19 U1.22 USB.4

## Polygon pours and split planes (outlines as drawn)
GND on Bottom Layer "Bottom Layer-GND" (solid, pour order 82): 355,3495 355,5 2980,5 2980,3490 2975,3495

## Keep-outs
Keep-Out Layer:
  lines w10: 360,5 360,3495 2975,3495 2975,5 360,5

## Silkscreen, mask and mechanical layers (free items; w line width, h text height)
Top Overlay:
  drawing of 22 lines, arcs and shapes, not listed
  text "- CHINMAY PATIL   (MSEE)" at 515,3380 h50
  text "- SHUBHAM BHOSALE   (MSME)" at 470,3315 h50
  text "UNIVERSITY OF COLORADO BOULDER" at 440,2875 h50
  text "ECEN 5013, OCT 2019" at 535,2820 h50
  text "FT232RL" at 920,2420 h20
  text "ARDUINO  /     UNO" at 1820,2015 h160
  text "GND" at 450,1625 h20 r315
  text "ATMEGA328P-ANR" at 1850,1020 h20
  text "IO_7" at 2490,910 h20
  text "GND" at 2895,895 h20 r315
  text "SKO BUFFS !" at 930,120 h120

## Text inside footprints (layer, text, board x,y; h text height)
J1: Top Overlay "AD5/SCL" at 2435,1900 h20; Top Overlay "AD4/SDA" at 2435,1845 h20; Top Overlay "AREF" at 2490,1745 h20; Top Overlay "GND" at 2505,1625 h20; Top Overlay "SCK" at 2505,1545 h20; Top Overlay "MISO" at 2495,1440 h20; Top Overlay "MOSI" at 2495,1340 h20; Top Overlay "SS" at 2520,1245 h20; Top Overlay "IO_9" at 2490,1135 h20; Top Overlay "IO_8" at 2490,1045 h20
J2: Top Overlay "AD0" at 805,710 h20; Top Overlay "AD1" at 805,610 h20; Top Overlay "AD2" at 805,510 h20; Top Overlay "AD3" at 805,405 h20; Top Overlay "AD5" at 800,210 h20; Top Overlay "AD4" at 800,310 h20
J3: Top Overlay "IO_6" at 2490,805 h20; Top Overlay "IO_5" at 2490,705 h20; Top Overlay "IO_4" at 2485,610 h20; Top Overlay "IO_3" at 2485,505 h20; Top Overlay "IO_2" at 2485,410 h20; Top Overlay "TX-O" at 2480,305 h20; Top Overlay "RX-I" at 2485,210 h20
J4: Top Overlay "GND" at 800,1015 h20; Top Overlay "GND" at 800,1110 h20; Top Overlay "VCC" at 800,1200 h20; Top Overlay "3.3V" at 800,1320 h20; Top Overlay "RESET" at 800,1415 h20; Top Overlay "VCC" at 800,1525 h20; Top Overlay "Vin" at 800,920 h20
J5: Top Overlay "GND" at 2885,805 h20 r315; Top Overlay "GND" at 2885,700 h20 r315; Top Overlay "GND" at 2885,600 h20 r315; Top Overlay "GND" at 2880,500 h20 r315; Top Overlay "GND" at 2880,395 h20 r315; Top Overlay "GND" at 2880,305 h20 r315; Top Overlay "GND" at 2880,195 h20 r315
J6: Top Overlay "GND" at 445,1530 h20 r315; Top Overlay "GND" at 440,1425 h20 r315; Top Overlay "GND" at 440,1325 h20 r315; Top Overlay "GND" at 435,1225 h20 r315; Top Overlay "GND" at 430,1130 h20 r315; Top Overlay "GND" at 435,1030 h20 r315; Top Overlay "GND" at 430,920 h20 r315
J7: Top Overlay "GND" at 2885,1035 h20 r315; Top Overlay "GND" at 2885,1135 h20 r315; Top Overlay "GND" at 2890,1240 h20 r315; Top Overlay "GND" at 2885,1340 h20 r315; Top Overlay "GND" at 2890,1445 h20 r315; Top Overlay "GND" at 2885,1545 h20 r315; Top Overlay "GND" at 2880,1645 h20 r315; Top Overlay "GND" at 2880,1740 h20 r315; Top Overlay "GND" at 2885,1835 h20 r315; Top Overlay "GND" at 2885,1930 h20 r315
J8: Top Overlay "GND" at 435,710 h20 r316.16; Top Overlay "GND" at 435,625 h20 r312.5; Top Overlay "GND" at 430,525 h20 r316.45; Top Overlay "GND" at 430,420 h20 r319.64; Top Overlay "GND" at 430,225 h20 r316.29; Top Overlay "GND" at 430,315 h20 r320.24